# Altium PCB PCB.PcbDoc
Units mm, origin at the board's own origin, x right, y up, seen from the top; angles counter-clockwise.
Board outline 21.08 x 20.45 mm, 2 copper layers (Top Layer, Bottom Layer); 8 components, 5 nets, 22 pads, 4 vias.
Unrouted connection lines stored in the file: 2.
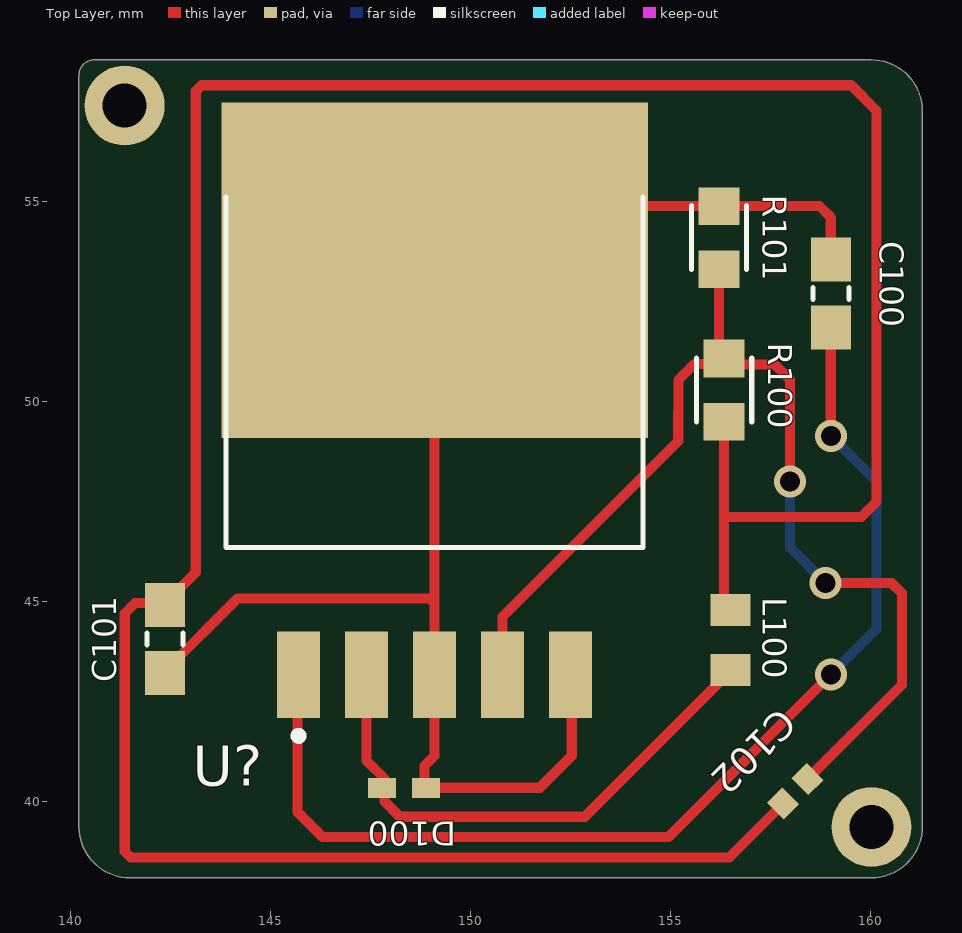
[diagram p0: Top Layer view]
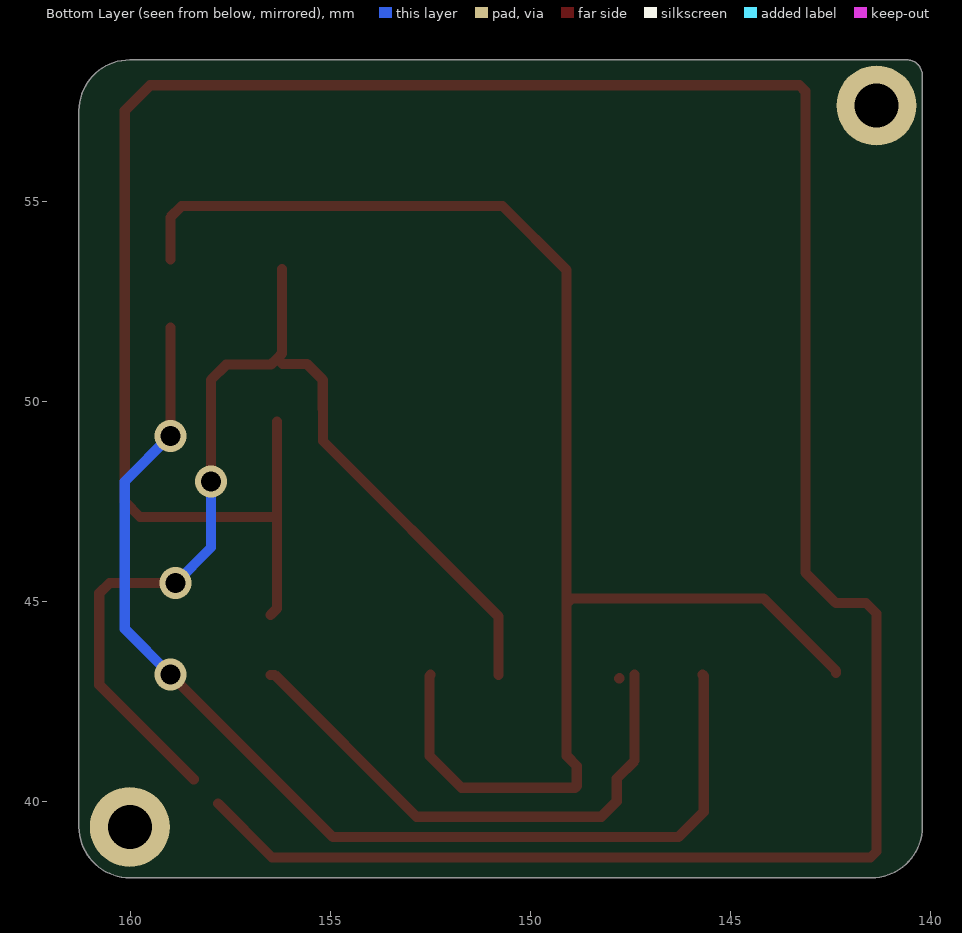
[diagram p1: Bottom Layer view, seen from below]
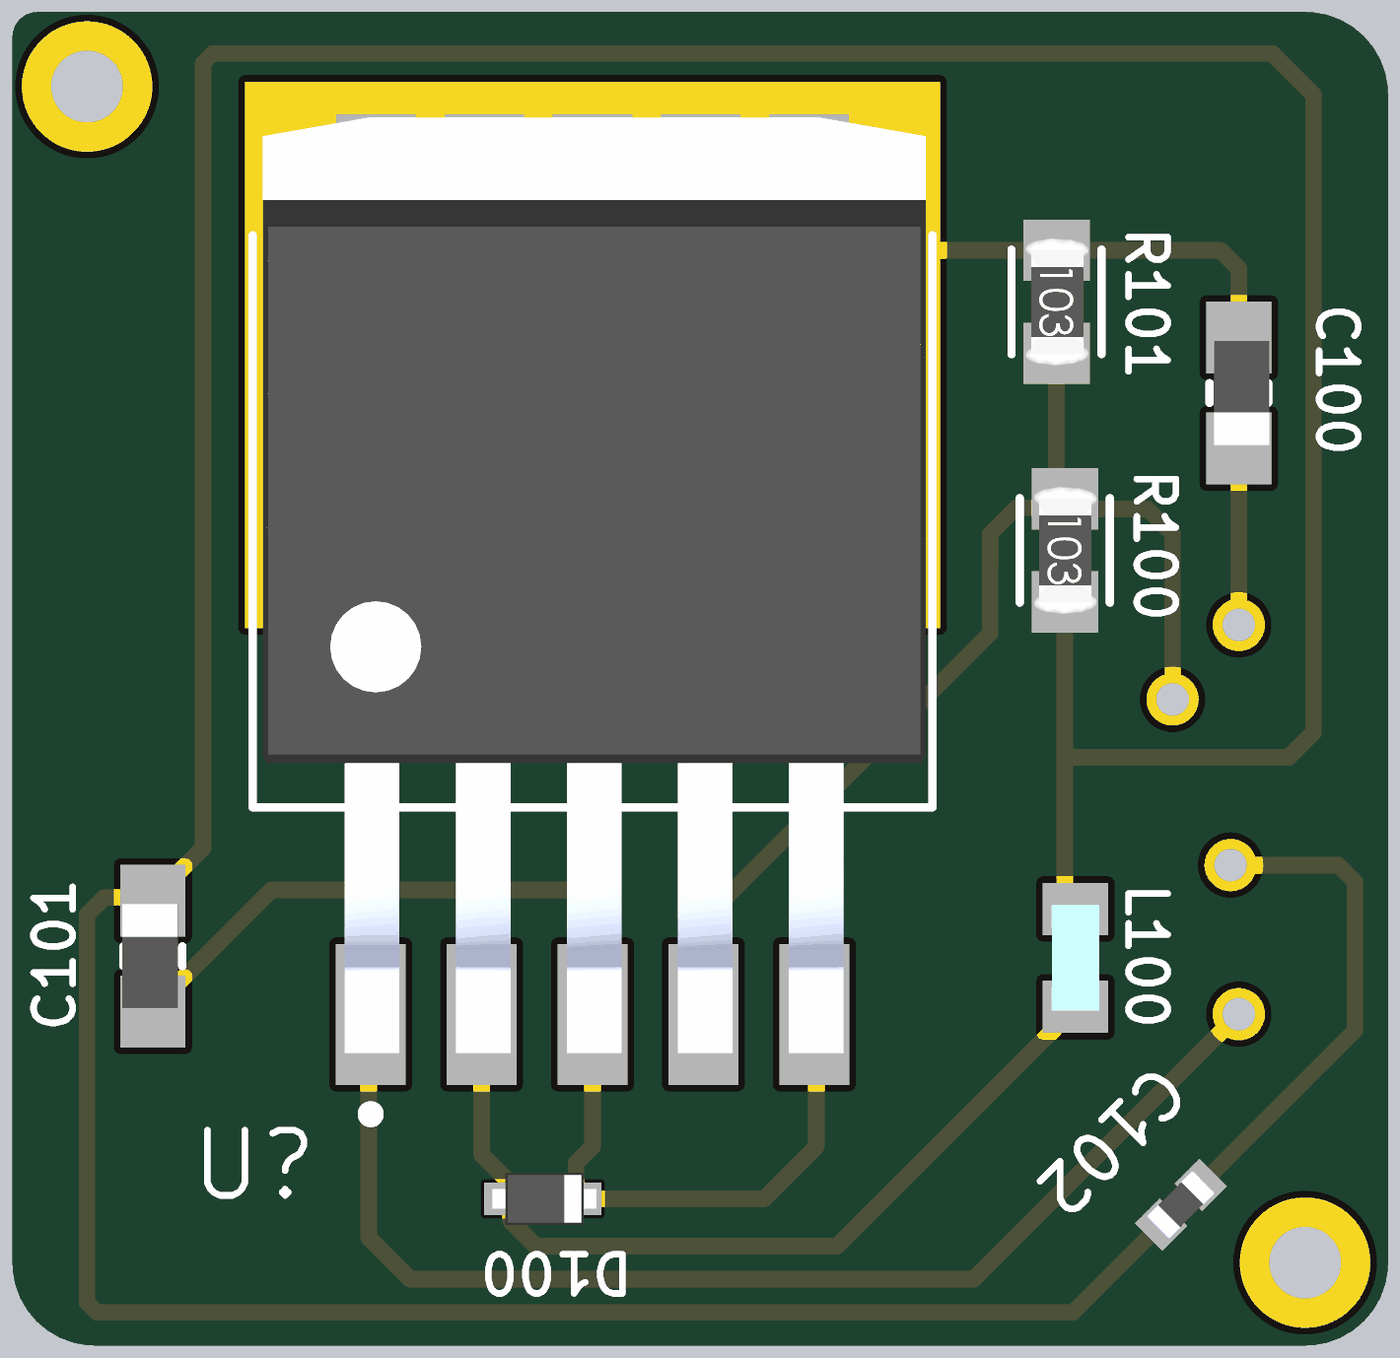
[diagram p2: 3D render of the assembled board from above, using the file's embedded part models]

## Layer stack, top to bottom
Top Solder: solder mask 0.0102, Solder Resist, Dk 3.5
Top Layer: signal copper 0.0356
Dielectric 1: dielectric 0.32, FR-4, Dk 4.8
Bottom Layer: signal copper 0.0356
Bottom Solder: solder mask 0.0102, Solder Resist, Dk 3.5

## Board outline
140.208,39.37 140.208,58.166 cw(c140.589,58.166) 140.589,58.547 160.02,58.547 cw(c160.02,57.277) 161.29,57.277 161.29,39.37 cw(c160.02,39.37) 160.02,38.1 141.478,38.1 cw(c141.478,39.37)

## Design rules (kind name [scope] priority, off if disabled: settings)
Clearance [All] p1: gap=0.124 ignorepadtopadclearanceinfootprint=FALSE except(0: Arc-Text Arc-Hole Track-Text Track-Hole SMDPad-Text SMDPad-Hole THPad-Text THPad-Hole Via-Text Via-Hole Fill-Text Fill-Hole Poly-Text Poly-Hole Region-Text Region-Hole Text-Text Text-Hole)
PolygonConnect [All] p1: connectstyle=Relief reliefconductorwidth=0.254 reliefentries=4 polygonreliefangle="90 Angle" airgapwidth=0.254
RoutingVias [All] p1: holewidth=0.5 width=0.8 viastyle="Through Hole" minholewidth=0.5 minwidth=0.3 maxholewidth=2 maxwidth=1
SolderMaskExpansion [All] p1: expansion=0.102 istentingtop=FALSE
Width [All] p1: maxlimit=0.254 minlimit=0.254 preferedwidth=0.254
30 further rules are at their usual default settings.

## Components (designator, comment, footprint, x,y, rotation, side; value= is the part's Value field where it differs from the comment)
C100 "470uF" F981C475MMA 159.004,52.705 r90 top
C101 "220uF" F981C475MMA 142.36,44.069 r270 top
C102 "22nF" CAP-0402-X7R 158.115,40.259 r225 top
D100 "1N5824" 1N5824 148.336,40.348 r0 top
L100 "33uH" IND_0603 156.591,44.19 r90 top
R100 "15.4k" RES-0603 156.337,50.292 r270 top
R101 "1k" RES-0603 156.21,54.102 r270 top
U? "LM2596" LM2596 149.098,49.784 r90 top

## Footprints (in the part's own frame and the unit in brackets; to place one, negate y for a bottom-side part, rotate by r counter-clockwise, add the part's x,y. Pads: shape width x height; smd on the part's side, far side on the other; paste and mask are expansions set on the pad)
1N5824 [mm]
  rect 0.7x0.5 smd mask+0.05: 1(0.55,0) 2(-0.55,0)
  body extent -0.77,-0.4 0.83,0.4, height 0.65
CAP-0402-X7R [mm]
  rect 0.54x0.6 smd mask+0.001: 1(-0.43,0) 2(0.43,0)
  body extent -0.5,-0.25 0.5,0.25, height 0.55
F981C475MMA [mm]
  rect 1.1x1 smd: 1(-0.85,0) 2(0.85,0)
  silkscreen extent -0.15,-0.45 0.15,0.45, body extent -0.8,-0.47 0.8,0.38, height 0.9
IND_0603 [mm]
  rect 0.8x1 smd: 1(-0.897,0.092) 2(0.603,0.092)
  body extent -0.96,-0.27 0.66,0.46, height 0.87
LM2596 [mm]
  rect 2.16x1.07 smd: 1(-6.608,3.4) 2(-6.608,1.7) 3(-6.608,0) 4(-6.608,-1.7) 5(-6.608,-3.4)
  rect 8.38x10.66 smd paste-5: 3(3.505,0)
  silkscreen extent -8.24,-5.21 5.34,5.21, body extent -7.2,-5.11 7.15,5.05, height 4.65
RES-0603 [mm]
  rect 0.94x1.02 smd mask+0.001: 1(-0.79,0) 2(0.79,0)
  silkscreen extent -0.8,-0.69 0.8,0.69, body extent -0.99,-0.48 0.99,0.5, height 0.44

## Part data
C100: library part CAP_0603_16V_Tantalum, "Cap Tant Solid 100uF 63V M CASE 20%( 1.6 X 0.85 X 0.8mm) Inward L SMD 12 Ohm 125C T/R", Capacitance=4.7uF, Case Code (Metric)=1608, Case Code (Imperial)=0603, ESR (Equivalent Series Resistance)=12R, Manufacturer="Kyocera AVX", Manufacturer Part Number=F981C475MMA, Max Operating Temperature=125°C, Min Operating Temperature=-55°C, Supplier Part Number 1=1361275, Tolerance=20%, Voltage Rating=16V, Case/Package=0603, Category="Tantalum Capacitors", ComponentLink1Description=http://www.farnell.com/datasheets/2602422.pdf?src-supplier=Farnell, ComponentLink1URL=http://www.farnell.com/datasheets/2602422.pdf?src-supplier=Farnell, ComponentLink2Description=http://www.mouser.com/ds/2/40/AVX_F98%20DTSH%2008_16-974527.pdf?src-supplier=Mouser, ComponentLink2URL=http://www.mouser.com/ds/2/40/AVX_F98%20DTSH%2008_16-974527.pdf?src-supplier=Mouser, ComponentLink3Description=http://datasheets.avx.com/F98.pdf?src-supplier=Digi-Key, ComponentLink3URL=http://datasheets.avx.com/F98.pdf?src-supplier=Digi-Key, ComponentLink4Description=http://www.farnell.com/datasheets/2602422.pdf?src-supplier=Newark, ComponentLink4URL=http://www.farnell.com/datasheets/2602422.pdf?src-supplier=Newark, Features="General Purpose", Mount="Surface Mount", Packaging="Tape and Reel", RoHS=Yes, RoHS Compliant=Yes, Stock 1=1, Supplier 1=RSComponents
C101: library part CAP_0603_16V_Tantalum, "Cap Tant Solid 220uF 35V M CASE 20%( 1.6 X 0.85 X 0.8mm) Inward L SMD 12 Ohm 125C T/R", Capacitance=4.7uF, Case Code (Metric)=1608, Case Code (Imperial)=0603, ESR (Equivalent Series Resistance)=12R, Manufacturer="Kyocera AVX", Manufacturer Part Number=F981C475MMA, Max Operating Temperature=125°C, Min Operating Temperature=-55°C, Supplier Part Number 1=1361275, Tolerance=20%, Voltage Rating=16V, Case/Package=0603, Category="Tantalum Capacitors", ComponentLink1Description=http://www.farnell.com/datasheets/2602422.pdf?src-supplier=Farnell, ComponentLink1URL=http://www.farnell.com/datasheets/2602422.pdf?src-supplier=Farnell, ComponentLink2Description=http://www.mouser.com/ds/2/40/AVX_F98%20DTSH%2008_16-974527.pdf?src-supplier=Mouser, ComponentLink2URL=http://www.mouser.com/ds/2/40/AVX_F98%20DTSH%2008_16-974527.pdf?src-supplier=Mouser, ComponentLink3Description=http://datasheets.avx.com/F98.pdf?src-supplier=Digi-Key, ComponentLink3URL=http://datasheets.avx.com/F98.pdf?src-supplier=Digi-Key, ComponentLink4Description=http://www.farnell.com/datasheets/2602422.pdf?src-supplier=Newark, ComponentLink4URL=http://www.farnell.com/datasheets/2602422.pdf?src-supplier=Newark, Features="General Purpose", Mount="Surface Mount", Packaging="Tape and Reel", RoHS=Yes, RoHS Compliant=Yes, Stock 1=1, Supplier 1=RSComponents
C102: library part CAP-0402-X7R-0.1uF, "0402 100 nF 25 V ±10 % Tolerance X7R Surface Mount Multilayer Ceramic Capacitor", Capacitance=100nF, Case Code (Metric)=1005, Case Code (Imperial)=0402, Dielectric=X7R, Manufacturer="Kyocera AVX", Manufacturer Part Number=04023C104KAT2A, Max Operating Temperature=125°C, Min Operating Temperature=-55°C, Package Quantity=1, Supplier Part Number 1=478-7868-1-ND, Tolerance=10%, Voltage=25V, Case/Package=0402, Category="Ceramic Capacitors", ComponentLink1Description=https://datasheet.ciiva.com/1123/1679506-1123344.pdf?src-supplier=Element14, ComponentLink1URL=https://datasheet.ciiva.com/1123/1679506-1123344.pdf?src-supplier=Element14, ComponentLink2Description=https://datasheet.ciiva.com/7614/cx7r-7614663.pdf?src-supplier=Digi-Key, ComponentLink2URL=https://datasheet.ciiva.com/7614/cx7r-7614663.pdf?src-supplier=Digi-Key, ComponentLink3Description=https://datasheet.ciiva.com/7709/1679506-7709527.pdf?src-supplier=Element14, ComponentLink3URL=https://datasheet.ciiva.com/7709/1679506-7709527.pdf?src-supplier=Element14, ComponentLink4Description=https://datasheet.ciiva.com/6265/cx7r-6265272.pdf?src-supplier=Digi-Key, ComponentLink4URL=https://datasheet.ciiva.com/6265/cx7r-6265272.pdf?src-supplier=Digi-Key, ComponentLink5Description=https://datasheet.ciiva.com/14906/cx7r-14906223.pdf?src-supplier=Digi-Key, ComponentLink5URL=https://datasheet.ciiva.com/14906/cx7r-14906223.pdf?src-supplier=Digi-Key, Depth=0.5mm, Lead Free="Lead Free", Length=1mm, Mount="Surface Mount", Number of Pins=2, Packaging="Tape and Reel", Pricing 1="1=0,10000, 10=0,03600, 50=0,01980, 100=0,01620, 500=0,01156, 1000=0,00908, 2500=0,00825, 5000=0,00759 (USD)", Radiation Hardening=No, REACH SVHC="No SVHC", RoHS=Yes, Stock 1=6710469, Supplier 1=Digi-Key, Termination=SMD/SMT, Thickness=0.022inch, Voltage Rating=25V, Voltage Rating (DC)=25V, Width=0.02inch
D100: "Diode Schottky 30V 5A 2-Pin Axial Leaded Tray", Average Rectified Current=5A, Case/Package=Axial, Forward Voltage=490mV, Manufacturer=Microsemi, Max Operating Temperature=125°C, Max Repetitive Reverse Voltage (Vrrm)=30V, Max Reverse Current=10mA, Min Operating Temperature=-65°C, Peak Non-Repetitive Surge Current=500A, Supplier Part Number 1=34AJ0587, Category="Rectifier Diodes", ComponentLink1Description=http://www.microsemi.com/document-portal/doc_download/5865-1n5823-25-pdf?src-supplier=Avnet, ComponentLink1URL=http://www.microsemi.com/document-portal/doc_download/5865-1n5823-25-pdf?src-supplier=Avnet, ComponentLink2Description=https://www.microsemi.com/document-portal/doc_download/5865-1n5823-25-datasheet?src-supplier=Digi-Key, ComponentLink2URL=https://www.microsemi.com/document-portal/doc_download/5865-1n5823-25-datasheet?src-supplier=Digi-Key, ComponentLink3Description=http://www.microsemi.com/datasheets/1N5823-25.PDF?src-supplier=Mouser, ComponentLink3URL=http://www.microsemi.com/datasheets/1N5823-25.PDF?src-supplier=Mouser, Element Configuration=Single, Forward Current=5A, Manufacturer Part Number=1N5824, Max Reverse Voltage (DC)=30V, Mount="Through Hole", Number of Pins=2, Packaging=Bulk, Radiation Hardening=No, RoHS=Yes, RoHS Compliant=Yes, Series=-, Supplier 1=Newark
L100: library part Inductor
R100 R101: library part RES-0603-1k, "贴片电阻 1000Ω ± 1.00% 0.1W ± 100ppm/℃ 0603", Case Code (Metric)=1608, Case Code (Imperial)=0603, Manufacturer="Vishay Dale", Manufacturer Part Number=CRCW06031K00FKEA, Max Operating Temperature=155°C, Max Power Dissipation=100mW, Min Operating Temperature=-55°C, Package Quantity=10, Resistance=1kR, Resistance Tolerance=1%, Resistor Type="Thick Film", Supplier Part Number 1=61M5328, Temperature Coefficient=100ppm/°C, Voltage Rating=75V, Case/Package=0603, Category="Chip SMD Resistors", ComponentLink1Description=https://datasheet.ciiva.com/11808/0900766b80d98afc-11808625.pdf?src-supplier=RSComponents, ComponentLink1URL=https://datasheet.ciiva.com/11808/0900766b80d98afc-11808625.pdf?src-supplier=RSComponents, ComponentLink2Description=https://datasheet.ciiva.com/46441/1720486-46441623.pdf?src-supplier=Element14, ComponentLink2URL=https://datasheet.ciiva.com/46441/1720486-46441623.pdf?src-supplier=Element14, ComponentLink3Description=https://datasheet.ciiva.com/46441/1720486-46441622.pdf?src-supplier=Element14, ComponentLink3URL=https://datasheet.ciiva.com/46441/1720486-46441622.pdf?src-supplier=Element14, ComponentLink4Description=https://datasheet.ciiva.com/26316/fld-crcw-e3-data-en-26316551.pdf?src-supplier=Distrelec, ComponentLink4URL=https://datasheet.ciiva.com/26316/fld-crcw-e3-data-en-26316551.pdf?src-supplier=Distrelec, ComponentLink5Description=https://datasheet.ciiva.com/46385/1697337-46385497.pdf?src-supplier=Element14, ComponentLink5URL=https://datasheet.ciiva.com/46385/1697337-46385497.pdf?src-supplier=Element14, ComponentLink6Description=https://datasheet.ciiva.com/2465/dcrcwe3-2465535.pdf?src-supplier=Digi-Key, ComponentLink6URL=https://datasheet.ciiva.com/2465/dcrcwe3-2465535.pdf?src-supplier=Digi-Key, ComponentLink7Description=https://datasheet.ciiva.com/2465/dcrcwe3-2465536.pdf?src-supplier=Digi-Key, ComponentLink7URL=https://datasheet.ciiva.com/2465/dcrcwe3-2465536.pdf?src-supplier=Digi-Key, ComponentLink8Description=https://datasheet.ciiva.com/2465/dcrcwe3-2465534.pdf?src-supplier=Digi-Key, ComponentLink8URL=https://datasheet.ciiva.com/2465/dcrcwe3-2465534.pdf?src-supplier=Digi-Key, ComponentLink9Description=https://datasheet.ciiva.com/16515/dcrcwe3-16515078.pdf?src-supplier=Avnet+Asia, ComponentLink9URL=https://datasheet.ciiva.com/16515/dcrcwe3-16515078.pdf?src-supplier=Avnet+Asia, ComponentLink10Description=https://datasheet.ciiva.com/8336/dcrcwe3-8336822.pdf?src-supplier=Avnet, ComponentLink10URL=https://datasheet.ciiva.com/8336/dcrcwe3-8336822.pdf?src-supplier=Avnet, ComponentLink11Description=https://datasheet.ciiva.com/16199/dcrcwe3-16199053.pdf?src-supplier=Future+Electronics, ComponentLink11URL=https://datasheet.ciiva.com/16199/dcrcwe3-16199053.pdf?src-supplier=Future+Electronics, ComponentLink12Description=https://datasheet.ciiva.com/16893/dcrcwe3-16893742.pdf?src-supplier=Avnet+Europe, ComponentLink12URL=https://datasheet.ciiva.com/16893/dcrcwe3-16893742.pdf?src-supplier=Avnet+Europe, ComponentLink13Description=https://datasheet.ciiva.com/3257/dcrcwe3-3257132.pdf?src-supplier=Avnet, ComponentLink13URL=https://datasheet.ciiva.com/3257/dcrcwe3-3257132.pdf?src-supplier=Avnet, Construction=Rectangular, Contact Plating=Tin, Depth=0.85mm, Features="Automotive AEC-Q200", Height=0.45mm, Lead Free="Lead Free", Length=1.55mm, Military Standard=Not, Mount="Surface Mount", Number of Pins=2, Number of Terminations=2, Packaging="Tape and Reel", Power Rating=100mW, Pricing 1="1=0,12500, 10=0,05300, 25=0,04300, 50=0,03100, 100=0,02100 (USD)", Radiation Hardening=No, REACH SVHC=Unknown, RoHS=Yes, RoHS Compliant=Yes, Series=CRCW, Size Code=0603, Supplier 1=Newark, Technology="THICK FILM", Termination=SMD/SMT, Tolerance=1%, Voltage Rating (DC)=75V, Weight=7.1E-05oz, Width=0.033inch
U?: "IC REG BUCK ADJ 3A TO263-5", Case/Package=TO-263, Manufacturer="TI National Semiconductor", Manufacturer Part Number=LM2596SX-ADJ/NOPB, Max Operating Temperature=125°C, Max Output Current=3A, Max Output Voltage=37V, Max Input Voltage=40V, Min Operating Temperature=-40°C, Min Output Voltage=1.2V, Min Supply Voltage=4.5V, Package Quantity=500, Quiescent Current=5mA, Supplier Part Number 1=926-LM2596SX-ADJNOPB, Switching Frequency=150kHz, ComponentLink1Description=https://datasheet.ciiva.com/22756/1768026-22756627.pdf?src-supplier=Farnell, ComponentLink1URL=https://datasheet.ciiva.com/22756/1768026-22756627.pdf?src-supplier=Farnell, ComponentLink2Description=https://datasheet.ciiva.com/22669/1874590-22669466.pdf?src-supplier=Element14, ComponentLink2URL=https://datasheet.ciiva.com/22669/1874590-22669466.pdf?src-supplier=Element14, ComponentLink3Description=https://datasheet.ciiva.com/46419/1768026-46419163.pdf?src-supplier=Element14, ComponentLink3URL=https://datasheet.ciiva.com/46419/1768026-46419163.pdf?src-supplier=Element14, ComponentLink4Description=https://datasheet.ciiva.com/6603/lm2596-6603277.pdf?src-supplier=Digi-Key, ComponentLink4URL=https://datasheet.ciiva.com/6603/lm2596-6603277.pdf?src-supplier=Digi-Key, Contact Plating=Tin,Matte, Efficiency=73%, Height=0.25inch, Lead Free="Contains Lead", Length=0.25inch, Min Input Voltage=4.5V, Mount="Surface Mount", Number of Outputs=1, Number of Pins=5, Operating Supply Voltage=40V, Output Configuration=Positive, Output Current=3A, Output Type=Adjustable, Output Voltage=37V, Packaging="Tape and Reel", Pricing 1="1=6,86000, 10=6,17000, 50=5,83000, 100=5,13000, 1000=4,78000, 10000=4,78000 (USD)", Radiation Hardening=No, Reach SVHC Compliant=Yes, RoHS=Yes, RoHS Compliant=Yes, Series="SIMPLE SWITCHER®", Supplier 1=Mouser, Synchronous Rectifier=No, Weight=0.056128oz, Width=0.25inch

## Free pads (board coordinates)
  round 2 hole 1.1: MH(141.351,57.404) MH(160.02,39.37)

## Via types
v1: diameter 0.8, hole 0.5, Top Layer to Bottom Layer, 4 vias

## Nets (pads, with @x,y where several pads share a name; then routed paths per layer and width w, separated by ;. In a path a pad name is that pad's centre, name@x,y a point inside that pad or via, vN(x,y) a via of type N, cw(c..) or ccw(c..) an arc to the next point about the centre after c; other vN are vias at no path point)
+5: C101.1 C102.2 L100.2 R100.2 | length 73.3
  Top Layer w0.254: R100.2 156.337,47.168 ; L100.2@156.499,44.672 156.337,44.834 156.337,47.168 ; C102.2 156.464,38.608 141.5,38.608 141.351,38.757 141.351,44.704 141.616,44.969 142.367,44.969 143.129,45.731 143.129,57.763 143.278,57.912 159.512,57.912 160.147,57.277 160.147,47.498 159.766,47.117 156.388,47.117 156.337,47.168
+12: C100.1 U?.1 | length 28.3
  Top Layer w0.254: U?.1 145.669,43.148 145.669,39.751 146.304,39.116 154.94,39.116 v1(159.004,43.18) ; v1(159.004,49.149) C100.1
  Bottom Layer w0.254: v1(159.004,43.18) 160.147,44.323 160.147,48.006 v1(159.004,49.149)
FeedBack: C102.1 R100.1 R101.2 U?.4 | length 27.8
  Top Layer w0.254: U?.4 150.798,44.626 155.19,49.018 155.195,50.547 155.595,50.947 156.202,50.947 R100.1 ; R101.2 156.21,51.209 R100.1 ; v1(157.988,48.006) 157.988,50.546 157.607,50.927 156.492,50.927 R100.1 ; C102.1 160.782,42.926 160.782,45.212 160.528,45.466 v1(158.877,45.466)
  Bottom Layer w0.254: v1(157.988,48.006) 157.988,46.355 v1(158.877,45.466)
GND: C100.2 C101.2 D100.1 pad.MH R101.1 U?.3 U?.5 | length 38.4
  Top Layer w0.254: C101.2 142.36,43.269 144.176,45.085 148.971,45.085 149.098,44.958 ; U?.5 152.527,43.147 152.527,41.148 151.727,40.348 D100.1 148.844,40.39 148.844,40.894 149.098,41.148 149.098,43.176 149.098,44.958 ; C100.2 159.004,54.61 158.722,54.892 R101.1 150.701,54.892 149.098,53.289 149.098,44.958
NetD100_2: D100.2 L100.1 U?.2 | length 13.6
  Top Layer w0.254: U?.2 147.398,41.028 147.846,40.58 147.846,40.348 147.846,40.009 148.231,39.624 152.852,39.624 156.399,43.172 L100.1@156.499,43.172 ; U?.2@147.779,43.088 U?.2@147.786,43.081